# Altium PCB BLDC.PcbDoc
Units mm, origin at the board's own origin, x right, y up, seen from the top; angles counter-clockwise.
Board outline 80 x 80 mm, 2 copper layers (Top Layer, Bottom Layer); 65 components, 38 nets, 162 pads, 103 vias.
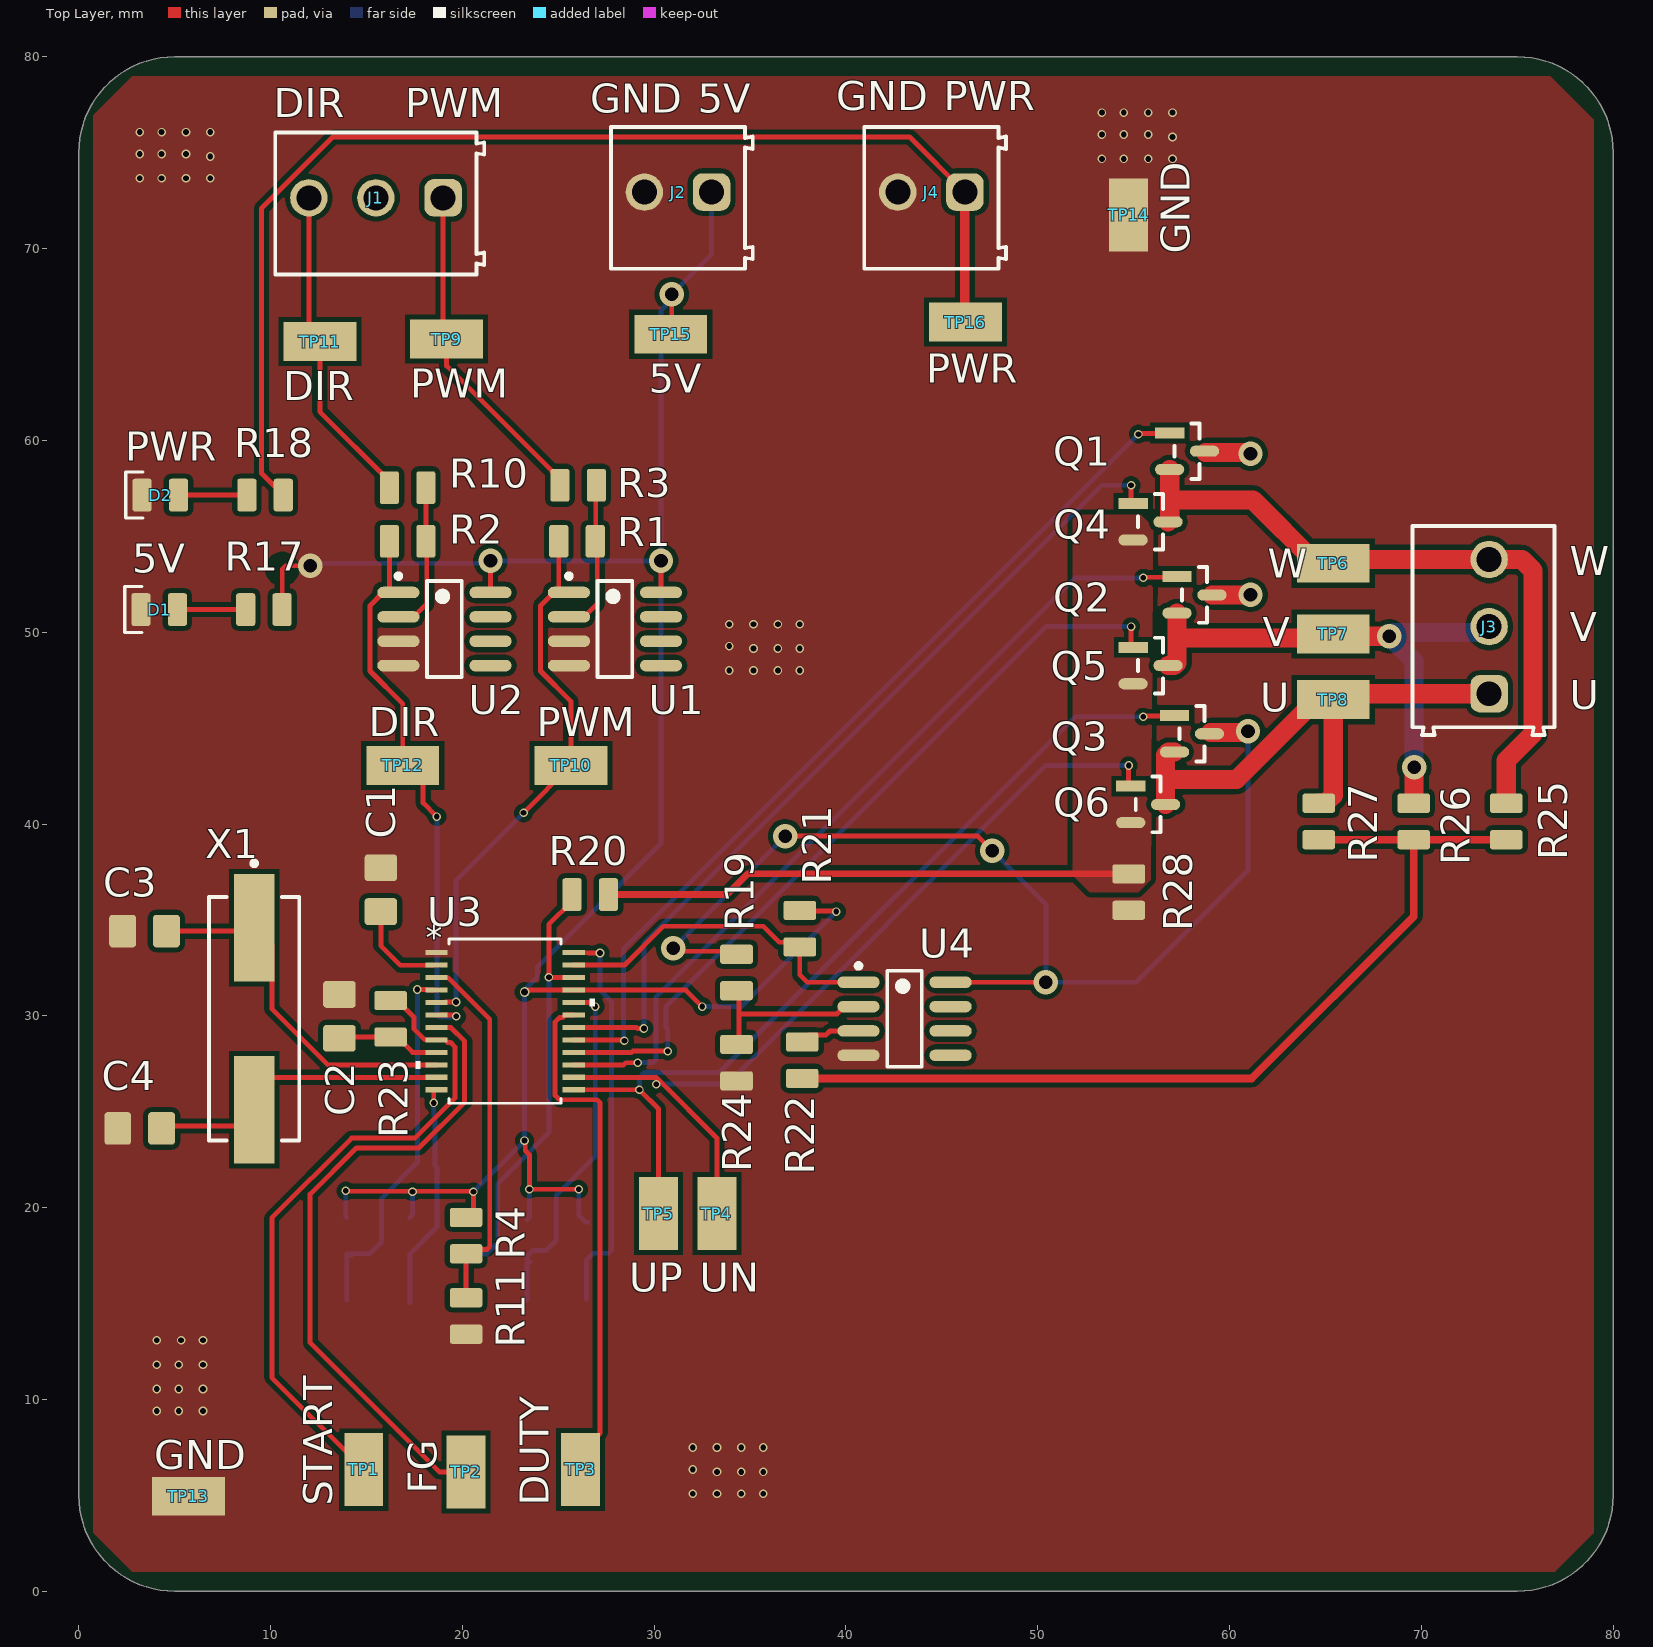
[diagram p0: Top Layer view]
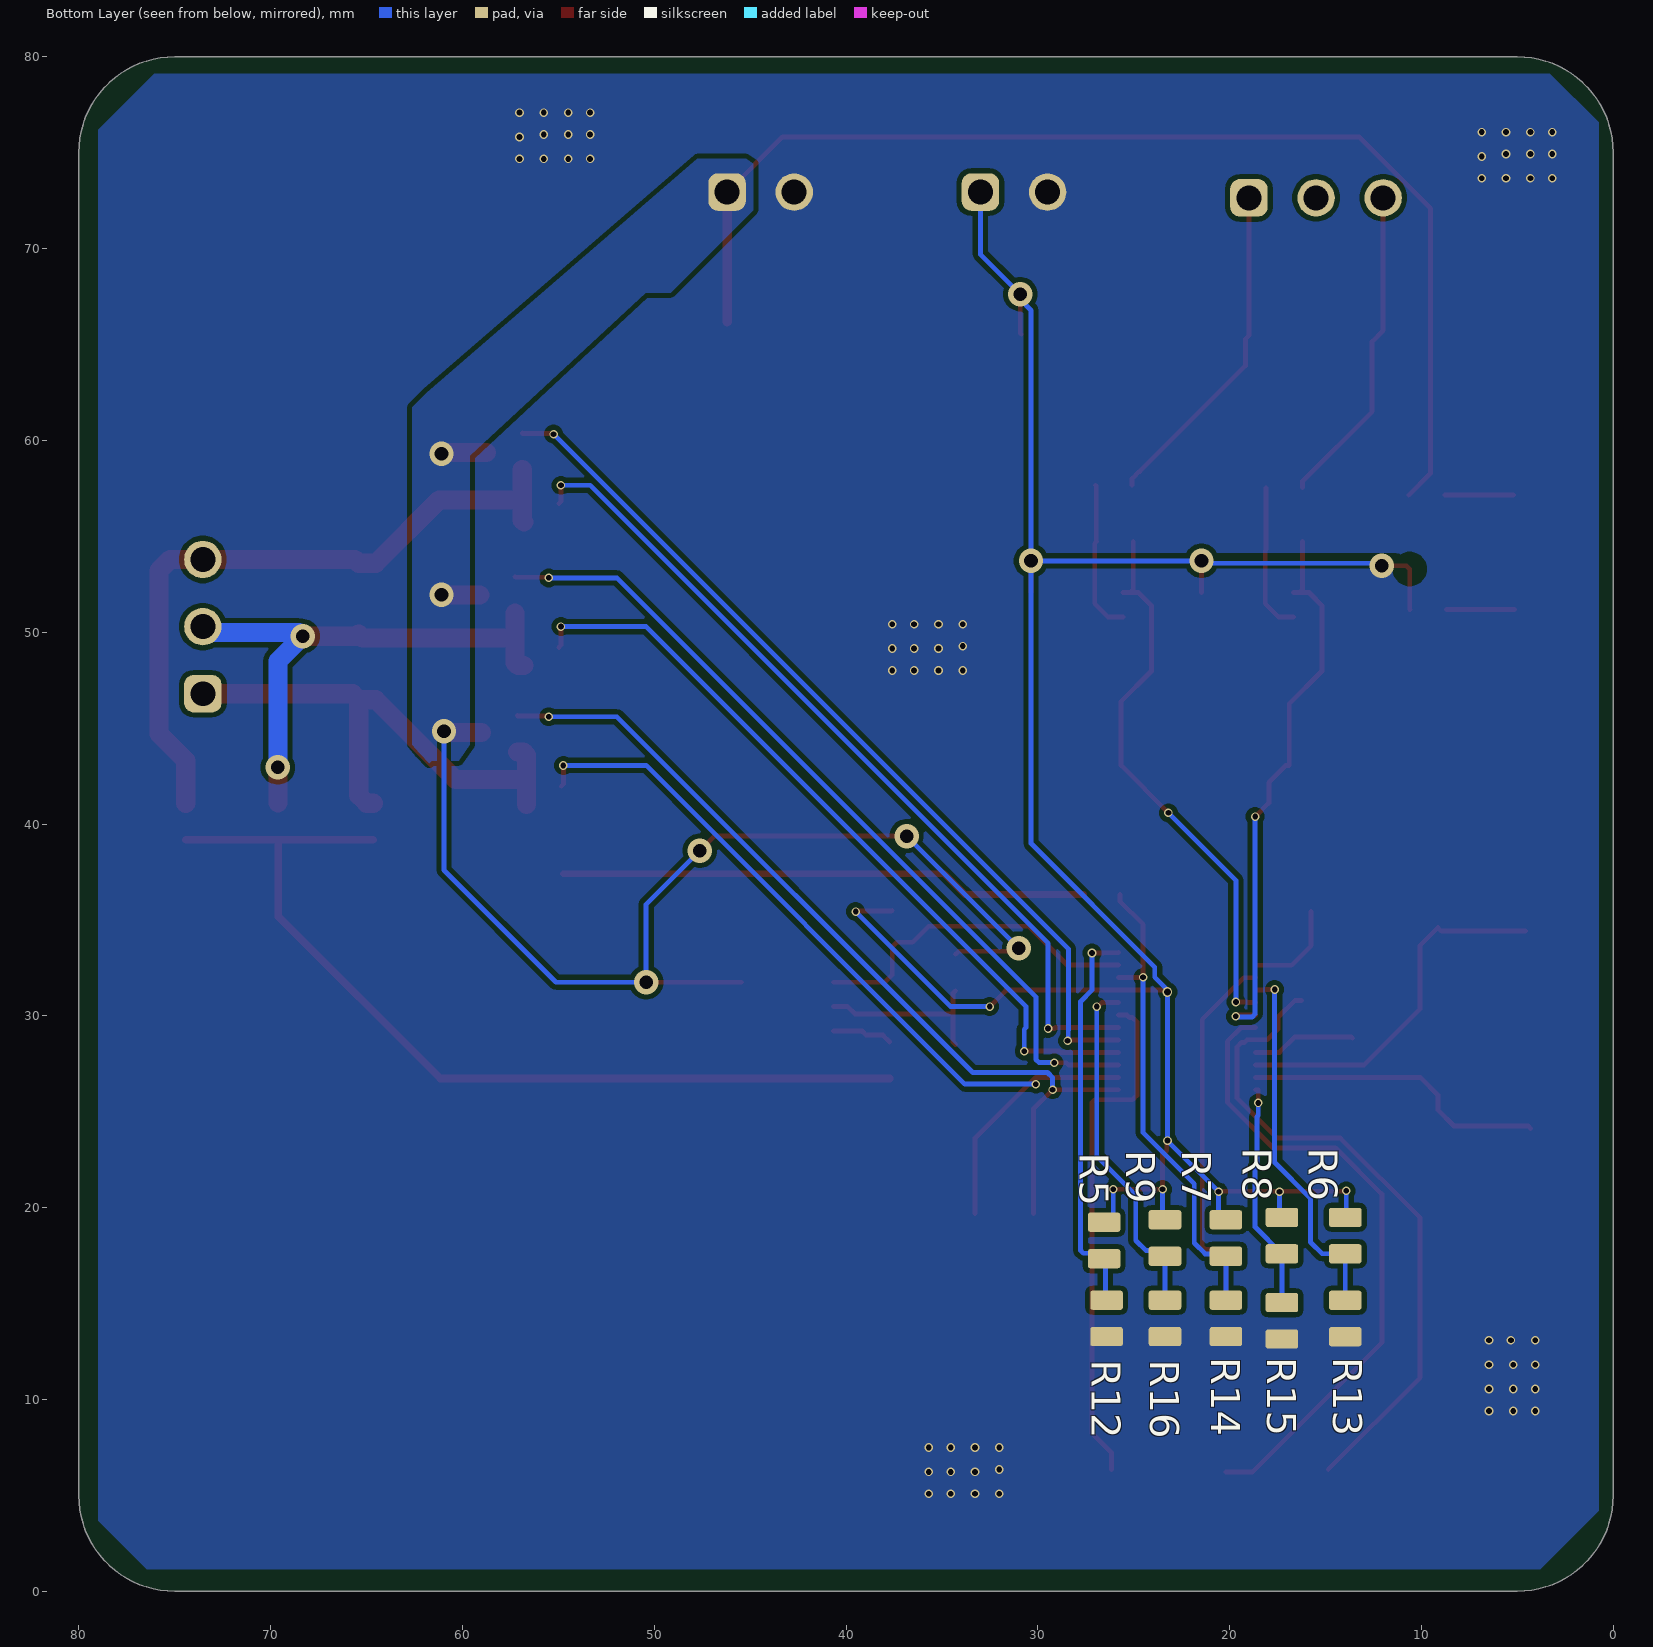
[diagram p1: Bottom Layer view, seen from below]
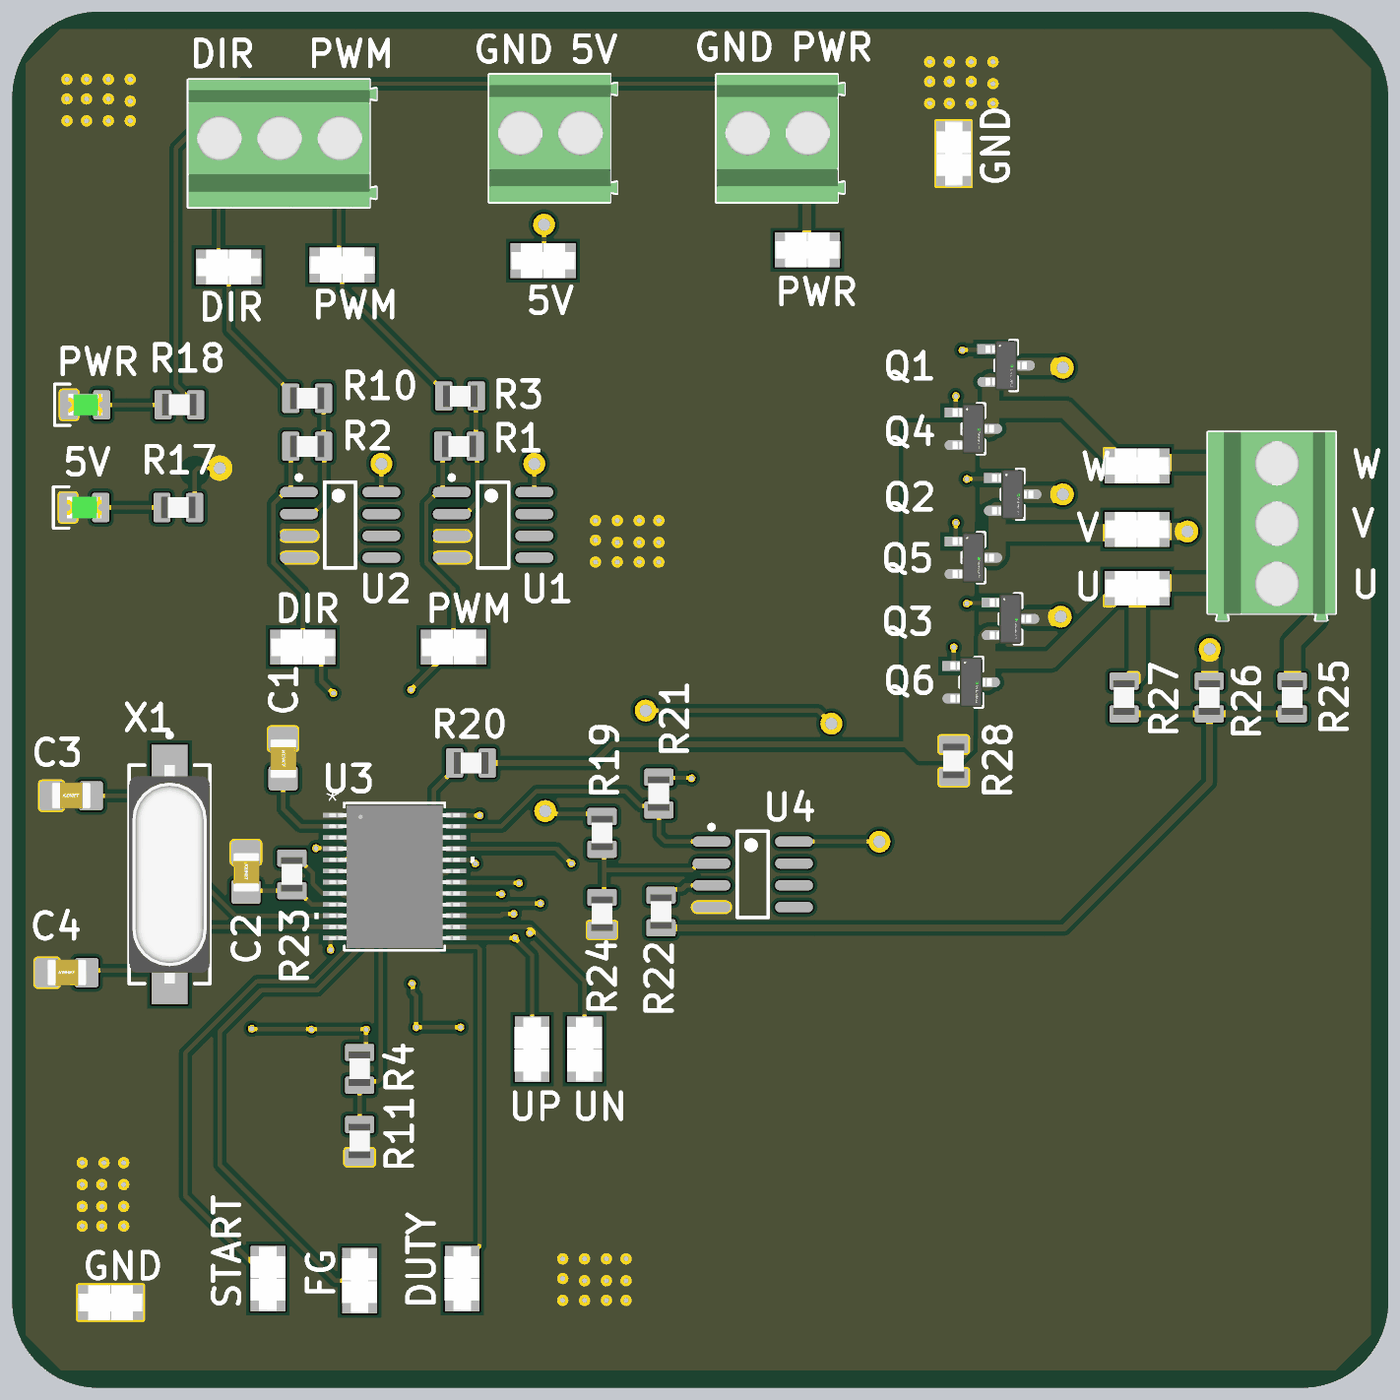
[diagram p2: 3D render of the assembled board from above, using the file's embedded part models]
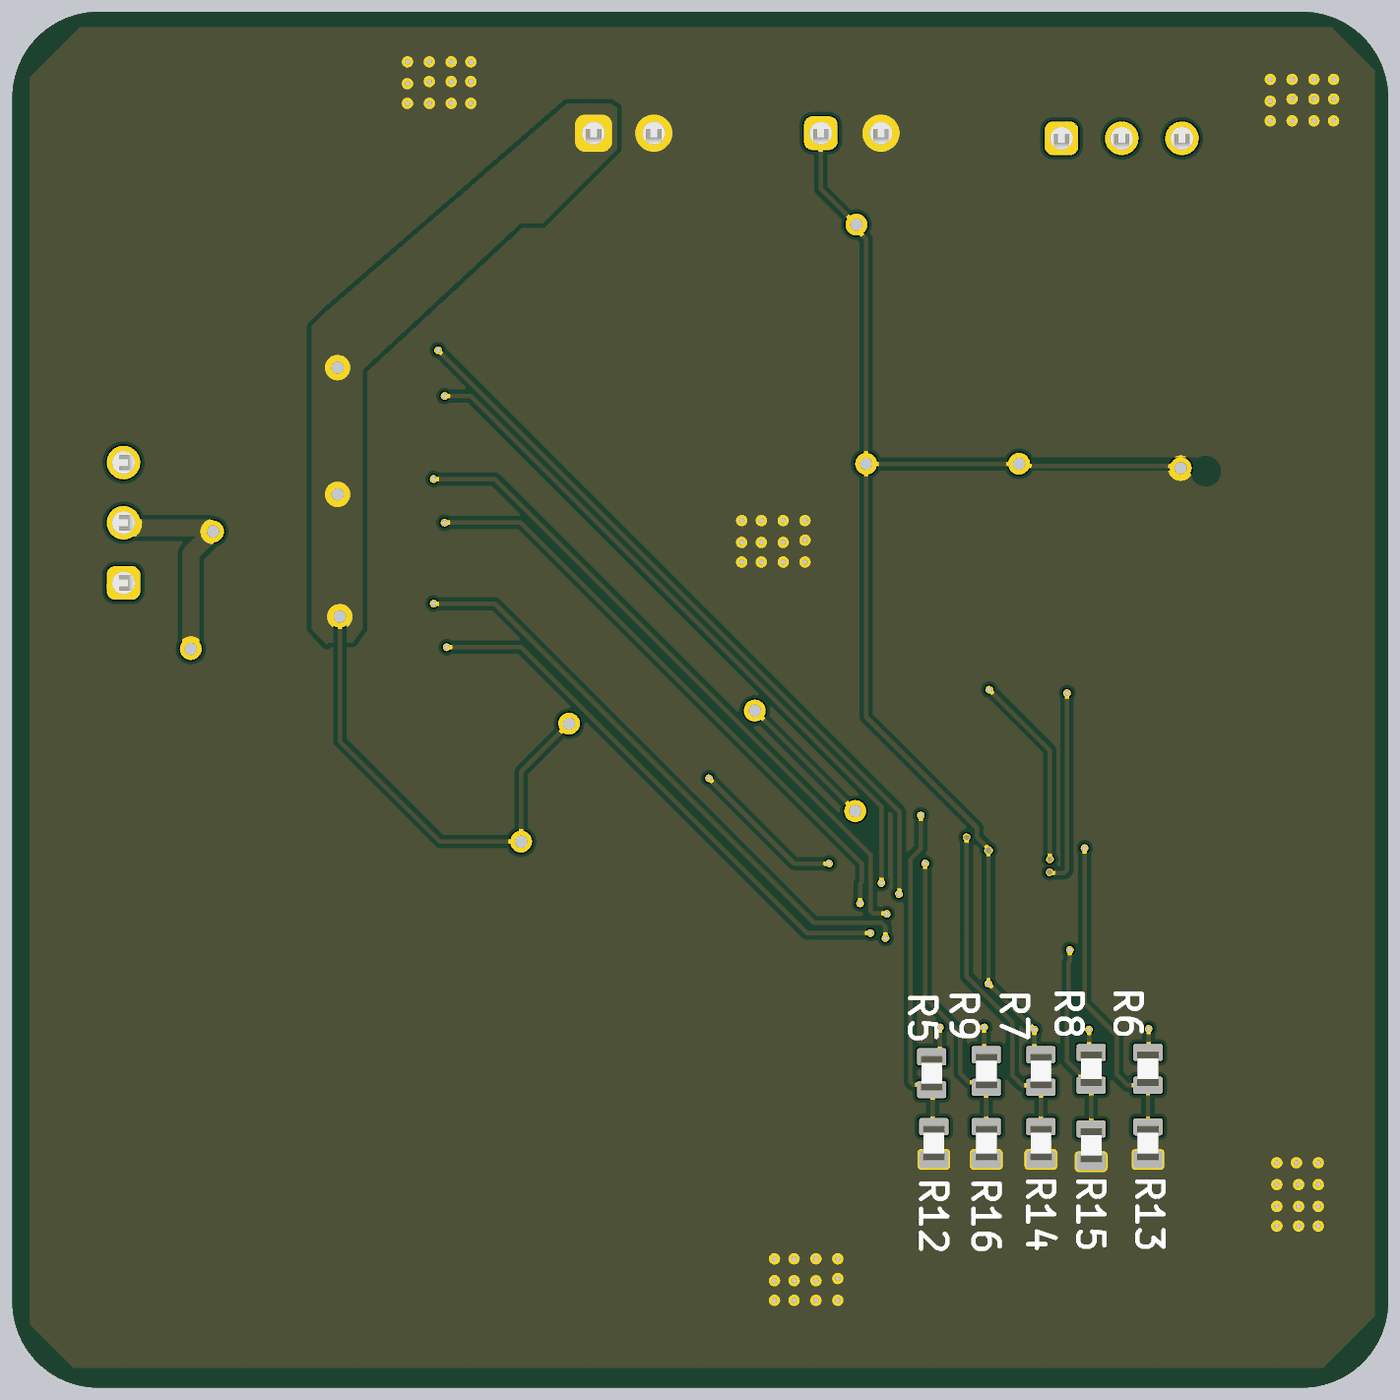
[diagram p3: 3D render of the assembled board from below, using the file's embedded part models]

## Layer stack, top to bottom
Top Solder: solder mask 0.0102, Solder Resist, Dk 3.5
Top Layer: signal copper 0.0356
Dielectric 1: dielectric 0.32, FR-4, Dk 4.8
Bottom Layer: signal copper 0.0356
Bottom Solder: solder mask 0.0102, Solder Resist, Dk 3.5

## Board outline
0,5 0,75 cw(c5,75) 5,80 75,80 cw(c75,75) 80,75 80,5 cw(c75,5) 75,0 5,0 cw(c5,5)

## Design rules (kind name [scope] priority, off if disabled: settings)
Clearance [All] p1: gap=0.254 ignorepadtopadclearanceinfootprint=FALSE except(0: Arc-Hole Track-Hole SMDPad-Hole THPad-Hole Via-Hole Fill-Hole Poly-Hole Region-Hole Text-Hole)
PlaneConnect [All] p1: planeconnectstyle=Direct reliefexpansion=0.508 reliefentries=4 reliefconductorwidth=0.254 reliefairgap=0.254
PolygonConnect [All] p1: connectstyle=Direct reliefconductorwidth=0.254 reliefentries=4 polygonreliefangle="90 Angle" airgapwidth=0.254
RoutingVias [All] p1: holewidth=0.711 width=1.27 viastyle="Through Hole" minholewidth=0.711 minwidth=1.27 maxholewidth=0.711 maxwidth=1.27
SolderMaskExpansion [All] p1: expansion=0.102 istentingtop=FALSE
Width [All] p1: maxlimit=0.254 minlimit=0.254 preferedwidth=0.254
29 further rules are at their usual default settings.

## Components (designator, comment, footprint, x,y, rotation, side; value= is the part's Value field where it differs from the comment)
C1 "0.47u" CAP_0805 15.748,36.576 r270 top
C2 "1u" CAP_0805 13.589,29.972 r270 top
C3 "22p" CAP_0805 3.429,34.417 r0 top
C4 "22p" CAP_0805 3.175,24.13 r0 top
D1 "GREEN" LED_0805_GREEN 4.191,51.181 r0 top
D2 "GREEN" LED_0805_GREEN 4.252,57.15 r0 top
J1 "691214110003" 691214110003 15.494,72.344 r180 top
J2 "691214110002" 691214110002 31.242,72.644 r180 top
J3 "691214110003" 691214110003 73.233,50.292 r90 top
J4 "691214110002" 691214110002 44.45,72.644 r180 top
Q1 "BSS138" FP-318-08-IPC_B 57.785,59.436 r0 top
Q2 "BSS138" FP-318-08-IPC_B 58.166,51.943 r0 top
Q3 "BSS138" FP-318-08-IPC_B 58.039,44.704 r0 top
Q4 "BSS138" FP-318-08-IPC_B 55.88,55.753 r0 top
Q5 "BSS138" FP-318-08-IPC_B 55.88,48.26 r0 top
Q6 "BSS138" FP-318-08-IPC_B 55.753,41.021 r0 top
R1 "200" RES_0805 25.974,54.737 r180 top
R2 "200" RES_0805 17.145,54.737 r180 top
R3 "1k" RES_0805 26.035,57.658 r0 top
R4 "10k_DNP" RES_0805 20.193,18.542 r90 top
R5 "10k_DNP" RES_0805 26.543,18.288 r90 bottom
R6 "10k_DNP" RES_0805 13.97,18.542 r90 bottom
R7 "10k_DNP" RES_0805 20.193,18.415 r90 bottom
R8 "10k_DNP" RES_0805 17.272,18.542 r90 bottom
R9 "10k_DNP" RES_0805 23.368,18.415 r90 bottom
R10 "1k" RES_0805 17.145,57.531 r0 top
R11 "0" RES_0805 20.193,14.351 r90 top
R12 "0_DNP" RES_0805 26.416,14.224 r90 bottom
R13 "0_DNP" RES_0805 13.97,14.219 r90 bottom
R14 "0_DNP" RES_0805 20.193,14.224 r90 bottom
R15 "0_DNP" RES_0805 17.272,14.097 r90 bottom
R16 "0_DNP" RES_0805 23.368,14.224 r90 bottom
R17 "200" RES_0805 9.652,51.181 r0 top
R18 "480" RES_0805 9.713,57.15 r0 top
R19 "100k" RES_0805 34.29,32.258 r90 top
R20 "1" RES_0805 26.67,36.322 r180 top
R21 "10k" RES_0805 37.592,34.544 r90 top
R22 "1k" RES_0805 37.719,27.686 r90 top
R23 "220k" RES_0805 16.256,29.845 r270 top
R24 "100k" RES_0805 34.29,27.559 r90 top
R25 "100k" RES_0805 74.422,40.132 r90 top
R26 "100k" RES_0805 69.596,40.132 r90 top
R27 "100k" RES_0805 64.643,40.132 r90 top
R28 "1" RES_0805 54.737,36.449 r90 top
TP1 "5019" KSTN-5019_V 14.859,6.35 r90 top
TP2 "5019" KSTN-5019_V 20.193,6.223 r90 top
TP3 "5019" KSTN-5019_V 26.162,6.35 r90 top
TP4 "5019" KSTN-5019_V 33.274,19.685 r90 top
TP5 "5019" KSTN-5019_V 30.226,19.685 r90 top
TP6 "5019" KSTN-5019_V 65.405,53.594 r0 top
TP7 "5019" KSTN-5019_V 65.405,49.911 r0 top
TP8 "5019" KSTN-5019_V 65.405,46.482 r0 top
TP9 "5019" KSTN-5019_V 19.177,65.278 r0 top
TP10 "5019" KSTN-5019_V 25.654,43.053 r180 top
TP11 "5019" KSTN-5019_V 12.573,65.151 r180 top
TP12 "5019" KSTN-5019_V 16.891,43.053 r180 top
TP13 "5019" KSTN-5019_V 5.715,4.953 r180 top
TP14 "5019" KSTN-5019_V 54.737,71.755 r270 top
TP15 "5019" KSTN-5019_V 30.861,65.532 r180 top
TP16 "5019" KSTN-5019_V 46.228,66.167 r180 top
U1 "MCP6022-I/SN" SOIC-SN8_N 27.953,50.165 r0 top
U2 "MCP6022-I/SN" SOIC-SN8_N 19.063,50.165 r0 top
U3 "TB6575FNG,C,8,EL" SSOP24-P-300-0p65A_TOS 22.225,29.718 r0 top
U4 "MCP6022-I/SN" SOIC-SN8_N 43.053,29.845 r0 top
X1 "ECS-40-20-5PX-TR" ABRA-ABLS-14.7456MHZ-B2-T_V 9.144,29.845 r270 top

## Footprints (in the part's own frame and the unit in brackets; to place one, negate y for a bottom-side part, rotate by r counter-clockwise, add the part's x,y. Pads: shape width x height; smd on the part's side, far side on the other; paste and mask are expansions set on the pad)
691214110002 [mm] "3.50 mm Horizontal Entry Modular, 2p"
  rrect50% 1.95x1.95 hole 1.3: 1(-1.75,-0.3)
  round 1.95 hole 1.3: 2(1.75,-0.3)
  silkscreen extent -3.9,-3.7 3.5,3.7, body extent -3.95,-3.7 3.5,3.7, height 8.55
691214110003 [mm] "3.50 mm Horizontal Entry Modular, 3p"
  rrect50% 1.95x1.95 hole 1.3: 1(-3.5,-0.3)
  round 1.95 hole 1.3: 2(0,-0.3) 3(3.5,-0.3)
  silkscreen extent -5.65,-3.7 5.25,3.7, body extent -5.7,-3.7 5.25,3.7, height 8.55
ABRA-ABLS-14.7456MHZ-B2-T_V [mm] "SMD, 2-Leads, Body 11.4x4.7mm"
  rect 5.6x2.1 smd: 1(-4.75,0) 2(4.75,0)
  silkscreen extent -8.22,-2.35 6.35,2.35, body extent -6.35,-2.35 6.35,2.35, height 4.16
CAP_0805 [mm]
  rrect25% 1.4x1.7 smd: 1(-1.143,0) 2(1.143,0)
  body extent -1.15,-0.76 1.15,0.79, height 1.01
FP-318-08-IPC_B [mm]
  rect 1.524x0.578 smd paste+0 mask+0: 1(-0.91,0.95)
  rrect100% 1.524x0.578 smd paste+0 mask+0: 2(-0.91,-0.95) 3(0.91,0)
  silkscreen extent -0.65,-1.45 0.65,1.45, body extent -1.92,-1.7 1.92,1.7, height 0.25
KSTN-5019_V [mm] "Test Point, 1-Leads, Body 3.81x2.03mm"
  rect 3.8x2.03 smd: 1(0,0)
  body extent -1.9,-1.01 1.9,1.02, height 2.29
LED_0805_GREEN [mm]
  rrect25% 1x1.7 smd: A(0.95,0) K(-0.95,0)
  silkscreen extent -1.8,-1.2 -0.9,1.2, body extent -1,-0.63 1,0.63, height 1.12
RES_0805 [mm]
  rrect25% 1x1.7 smd: 1(-0.95,0) 2(0.95,0)
  body extent -1,-0.63 1,0.63, height 0.47
SOIC-SN8_N [mm] "SOIC, 8-Leads, Body 4.9x3.9mm, Pitch 1.27mm, IPC Medium Density"
  oval 2.2x0.6 smd: 1(-2.4,1.905) 2(-2.4,0.635) 3(-2.4,-0.635) 4(-2.4,-1.905) 5(2.4,-1.905) 6(2.4,-0.635) 7(2.4,0.635) 8(2.4,1.905)
  silkscreen extent -2.52,-2.5 0.9,2.88, body extent -2,-2.5 2,2.5, height 1.75
SSOP24-P-300-0p65A_TOS [mm]
  rect 1.161x0.271 smd paste+0 mask+0: 1(-3.575,3.575) 2(-3.575,2.925) 3(-3.575,2.275) 4(-3.575,1.625) 5(-3.575,0.975) 6(-3.575,0.325) 7(-3.575,-0.325) 8(-3.575,-0.975) 9(-3.575,-1.625) 10(-3.575,-2.275) 11(-3.575,-2.925) 12(-3.575,-3.575) 13(3.575,-3.575) 14(3.575,-2.925) 15(3.575,-2.275) 16(3.575,-1.625) 17(3.575,-0.975) 18(3.575,-0.325) 19(3.575,0.325) 20(3.575,0.975) 21(3.575,1.625) 22(3.575,2.275) 23(3.575,2.925) 24(3.575,3.575)
  silkscreen extent -4.66,-4.28 4.66,4.28, body extent -3.8,-4.15 3.8,4.15, height 1.6

## Part data
C1 C2 C3 C4: library part CAP_0805, "Capacitor SMD 0805"
D1 D2: library part LED_0805_GREEN, "LED 0805 GREEN SMD"
J1 J3: library part CMP-1502-02466-2, Color="Blue, Green", Current=10A, Max Operating Temperature=105°C, Min Operating Temperature=-40°C, Voltage=300V, Contact Material=Brass, Contact Plating="Brass, Tin", Current Rating=10A, Height=12.2mm, Housing Material=Nylon, Lead Pitch=3.5mm, Length=7.4mm, Mount="Through Hole", NexarPartId=18818289, Number of Contacts=3, Number of Levels=1, Number of Pins=3, Number of Positions Per Level=3, Packaging=Box, Pitch=3.5052mm, Plating="Brass, Steel", REACH SVHC=Unknown, RoHS=Compliant, Stripping Length=-6mm, Termination=Screw, Voltage Rating=300V, Width=10.9mm, Wire Gauge (Max)=24AWG, Wire Gauge (Min)=16AWG, Wire/Cable Gauge=24AWG
J2 J4: library part CMP-1502-02464-2, Color="Blue, Green", Current=10A, Max Operating Temperature=105°C, Min Operating Temperature=-40°C, Voltage=300V, Contact Material=Brass, Contact Plating="Brass, Tin", Current Rating=10A, Height=8.7mm, Housing Material=Nylon, Lead Pitch=3.5mm, Length=7.4mm, Mount="Through Hole", NexarPartId=18818288, Number of Contacts=2, Number of Levels=1, Number of Pins=2, Number of Positions Per Level=2, Number of Rows=1, Packaging=Box, Pitch=3.5052mm, Plating="Brass, Steel", REACH SVHC=Unknown, RoHS=Compliant, Stripping Length=-6mm, Termination=Screw, Voltage Rating=300V, Width=7.9mm, Wire Gauge (Max)=24AWG, Wire Gauge (Min)=16AWG, Wire/Cable Gauge=24AWG
Q1 Q2 Q3 Q4 Q5 Q6: library part CMP-07173-000101-1, "MOSFET N-CH 50V 220MA SOT-23", Case/Package=SOT-23, Continuous Drain Current (ID)=220mA, Drain to Source Breakdown Voltage=50V, Drain to Source Resistance=3.5R, Gate to Source Voltage (Vgs)=20V, Input Capacitance=27pF, Max Operating Temperature=150°C, Max Power Dissipation=360mW, Min Operating Temperature=-55°C, On-State Resistance=6R, Package Quantity=1, Threshold Voltage=1.3V, Contact Plating=Tin, Current Rating=220mA, Drain to Source Voltage (Vdss)=50V, Dual Supply Voltage=50V, Element Configuration=Single, Fall Time=9ns, Height=0.93mm, Lead Free="Lead Free", Length=2.92mm, Mount="Surface Mount", Nominal Vgs=1.3V, Number of Elements=1, Number of Pins=3, Packaging="Tape and Reel", Power Dissipation=360mW, Radiation Hardening=No, Rds On Max=3.5R, REACH SVHC="No SVHC", Rise Time=9ns, Termination=SMD/SMT, Turn-Off Delay Time=20ns, Turn-On Delay Time=2.5ns, Voltage Rating (DC)=50V, Weight=0.03g, Width=1.3mm
R1 R2 R3 R4 R5 R6 R7 R8 R9 R10 R11 R12 R13 R14 R15 R16 R17 R18 R19 R20 R21 R22 R23 R24 R25 R26 R27 R28: library part RES_0805, "Resistor SMD 0805"
TP1 TP2 TP3 TP4 TP5 TP6 TP7 TP8 TP9 TP10 TP11 TP12 TP13 TP14 TP15 TP16: library part CMP-1672-00008-1, "Test Point, 1 Position SMD, RoHS, Tape and Reel", Package Quantity=1000, ComponentLink1Description="Manufacturer URL", ComponentLink1URL=http://www.keyelco.com/, ComponentLink2Description=Datasheet, ComponentLink2URL=http://www.keyelco.com/product-pdf.cfm?p=1357, Contact Plating=Silver, DatasheetVersion=03/2014, Mount="Surface Mount", Mounting Technology="Surface Mount", PackageDescription="1-Pin Surface Mount Device, Body 3.81 x 2.03 mm", PackageReference=5019, Packaging="Tape and Reel", Pins=1, RoHSCompliant=True
U1 U2 U4: library part CMP-0187-00284-3, "None", Case/Package=SOIC, Input Bias Current=150pA, Input Offset Voltage (Vos)=500uV, Max Operating Temperature=85°C, Max Supply Voltage=5.5V, Min Operating Temperature=-40°C, Min Supply Voltage=2.5V, Nominal Supply Current=1mA, Output Current=22mA, Package Quantity=100, Power Supply Rejection Ratio (PSRR)=74dB, Voltage Gain=110dB, Amplifier Type="GENERAL PURPOSE", Bandwidth=10MHz, Common Mode Rejection Ratio=70dB, Gain=110dB, Gain Bandwidth Product=10MHz, Harmonic Distortion=0.00053%, Height=0.049inch, Input Offset Voltage-Max=500uV, Lead Free="Lead Free", Length=0.192inch, Mount="Surface Mount", Number of Amplifiers=2, Number of Channels=2, Number of Circuits=2, Number of Elements=2, Number of Pins=8, Packaging=Rail/Tube, Radiation Hardening=No, REACH SVHC="No SVHC", RoHS Compliant=Yes, Slew Rate=7V/µs, Supply Current=1mA, Technology=CMOS, Unity Gain Bandwidth Product=10MHz, Width=0.154inch
U3: "No Description Available", Mfr_Name="Toshiba Electronic Devices & Storage Corp.", RefDes=RefDes, Type=Type
X1: library part CMP-2000-05726-1, "Low Profile Crystal, 8.0 MHz, +/- 30 ppm, -20 to 70 degC, 2-Pin SMD, RoHS, Tape and Reel", Case Height=4.2mm, Case Length=11.4mm, Case Width=4.7mm, Frequency=8MHz, Frequency Stability=50PPM, Load Capacitance=18pF, Manufacturer=ABRACON, Operating Temperature Range=-20Cto+70C, Package / Case=HC-49/US, Package Description="2-Pin Surface Mount Device, Body 11.4 x 4.7 mm", Package Reference=ABLS-14.7456MHZ-B2-T, Tolerance=30PPM, Brand=ABRACON, Datasheet URL=http://www.abracon.com/Resonators/abls.pdf, Datasheet Version=04/2011, Dimensions=4.7mmWx11.4mmLx4.2mmH, ESR=80Ohms, Factory Pack Quantity=1000, Manufacturer URL=http://www.abracon.com/, Mounting Style=SMD/SMT, Mounting Technology=SurfaceMount, Package URL=http://www.abracon.com/Support/PackageDrawing/Resonators/ABLS-2D.pdf, Packaging=Reel, Product Category=Crystals, RoHS=Details, Series=ABLS, Termination Style=SMD/SMT, Type=LowProfileMicroprocessorCrystal

## Via types
v1: diameter 0.45, hole 0.3, Top Layer to Bottom Layer, 89 vias
v2: diameter 1.27, hole 0.711, Top Layer to Bottom Layer, 13 vias
v3: diameter 0.5, hole 0.35, Top Layer to Bottom Layer, 1 vias

## Nets (pads, with @x,y where several pads share a name; then routed paths per layer and width w, separated by ;. In a path a pad name is that pad's centre, name@x,y a point inside that pad or via, vN(x,y) a via of type N, cw(c..) or ccw(c..) an arc to the next point about the centre after c; other vN are vias at no path point)
+5V: J2.1 R4.2 R5.2 R6.2 R7.2 R8.2 R9.2 R17.2 R21.2 TP15.1 U1.8 U2.8 U3.21 | length 126.9
  Top Layer w0.254: R17.2 10.606,51.185 10.606,53.289 10.783,53.467 v2(12.065,53.467) ; v1(13.922,20.876) 13.946,20.852 20.55,20.852 v1(20.574,20.828) 20.574,19.738 20.328,19.492 R4.2 ; U2.8 v2(21.463,53.721) ; v1(23.241,23.495) 23.279,23.457 23.279,22.978 23.495,22.762 v1(23.495,20.955) v1(26.064,20.955) ; v3(23.241,31.242) 23.308,31.242 23.409,31.343 U3.21 31.649,31.343 v1(32.512,30.48) ; U1.8 v2(30.353,53.721) ; TP15.1 30.918,65.589 v2(30.918,67.626) ; R21.2 37.623,35.464 39.466,35.464 v1(39.497,35.433)
  Bottom Layer w0.254: v2(12.065,53.467) 12.192,53.594 21.336,53.594 v2(21.463,53.721) v2(30.353,53.721) ; v1(13.922,20.876) 13.922,19.54 R6.2 ; R8.2 17.399,19.619 v1(17.399,20.828) ; R7.2 20.328,19.365 20.574,19.611 v1(20.574,20.828) v1(23.241,23.495) v3(23.241,31.242) 23.241,31.351 23.905,32.015 23.905,32.541 30.353,38.989 v2(30.353,53.721) ; R9.2 23.495,19.492 v1(23.495,20.955) ; v1(26.064,20.955) 26.064,19.611 26.437,19.238 R5.2 ; v1(32.512,30.48) 34.544,30.48 v1(39.497,35.433) ; J2.1 32.992,69.7 v2(30.918,67.626) 30.918,67.351 30.353,66.786 v2(30.353,53.721)
DIR_IN: J1.3 R10.1 TP11.1 | length 16.9
  Top Layer w0.254: J1.3 11.994,65.73 TP11.1 12.573,61.503 16.195,57.881 R10.1
DIR_OUT: R2.2 TP12.1 U2.1 U3.6 | length 29.5
  Top Layer w0.254: R2.2 16.195,52.23 U2.1@16.355,52.07 ; U2.1 U2.1@16.355,52.07 ; U3.6 18.658,30.035 19.569,30.035 19.632,29.972 v1(19.685,29.972) ; v1(18.669,40.386) 17.951,41.104 17.951,42.165 17.063,43.053 TP12.1 16.891,46.269 15.182,47.978 15.182,51.389 15.863,52.07 U2.1@16.355,52.07
  Bottom Layer w0.254: v1(18.669,40.386) 18.669,30.099 18.834,29.934 19.647,29.934 v1(19.685,29.972)
DUTY: TP3.1 U3.19 | length 27
  Top Layer w0.254: U3.19 25.355,30.043 25.221,29.909 25.198,29.909 25.062,29.909 24.838,29.686 24.838,25.85 25.062,25.627 27.029,25.627 27.178,25.478 27.178,8.251 26.162,7.235 TP3.1
FG_OUT: TP2.1 U3.7 | length 33.6
  Top Layer w0.254: U3.7 18.658,29.385 19.406,29.385 20.12,28.671 20.12,25.497 17.736,23.114 14.478,23.114 12.065,20.701 12.065,12.954 18.796,6.223 TP2.1
FMAX: R6.1 R13.2 U3.4 | length 19.6
  Top Layer w0.254: v1(17.653,31.369) 18.179,31.369 18.205,31.343 U3.4
  Bottom Layer w0.254: R13.2 13.97,17.526 R6.1@14.218,17.526 ; R6.1 15.179,17.592 15.793,18.206 15.793,20.492 17.653,22.352 v1(17.653,31.369)
FST: R5.1 R12.2 U3.24 | length 20.7
  Top Layer w0.254: U3.24 25.808,33.285 26.561,33.285 26.572,33.274 v1(27.178,33.274)
  Bottom Layer w0.254: R12.2@26.479,15.238 26.479,17.275 26.828,17.623 27.625,17.623 27.774,17.772 27.774,30.741 27.178,31.337 v1(27.178,33.274)
GND: C1.1 C2.1 C3.1 C4.1 D1.K D2.K J2.2 J4.2 R11.1 R12.1 R13.1 R14.1 R15.1 R16.1 R24.1 R28.1 TP13.1 TP14.1 U1.3 U1.4 U2.3 U2.4 U3.1 U4.4
  other v1: 32.004,5.08 33.274,5.08 34.544,5.08 35.687,5.08 33.274,6.223 34.544,6.223 35.687,6.223 32.004,6.35 32.004,7.493 33.274,7.493 34.544,7.493 35.687,7.493 4.064,9.398 5.207,9.398 6.477,9.398 4.064,10.541 5.207,10.541 6.477,10.541 4.064,11.811 5.207,11.811 6.477,11.811 4.064,13.081 5.334,13.081 6.477,13.081 33.909,48.006 35.179,48.006 36.449,48.006 37.592,48.006 35.179,49.149 36.449,49.149 37.592,49.149 33.909,49.276 33.909,50.419 35.179,50.419 36.449,50.419 37.592,50.419 3.175,73.66 4.318,73.66 5.588,73.66 6.858,73.66 53.34,74.676 54.483,74.676 55.753,74.676 57.023,74.676 6.858,74.803 3.175,74.93 4.318,74.93 5.588,74.93 57.023,75.819 53.34,75.946 54.483,75.946 55.753,75.946 3.175,76.073 4.318,76.073 5.588,76.073 6.858,76.073 53.34,77.089 54.483,77.089 55.753,77.089 57.023,77.089
IP: C2.2 R23.2 U3.9 | length 5.4
  Top Layer w0.254: C2.2 13.655,28.895 R23.2 16.606,28.895 17.408,28.093 U3.9
LA: R8.1 R15.2 U3.12 | length 11.9
  Top Layer w0.254: v1(18.506,25.459) 18.506,26.135 18.514,26.143 U3.12
  Bottom Layer w0.254: R15.2 R8.1 18.669,18.989 18.669,22.116 18.582,22.203 18.582,24.726 18.506,24.802 v1(18.506,25.459)
MOT_OUT: Q4.2 Q5.2 Q6.2 R20.1 R28.2 | length 27.6
  Top Layer w0.35: R20.1 33.797,36.322 34.874,37.399 R28.2
MOTOR_U: J3.1 Q3.2 Q6.3 R27.2 TP8.1 | length 27.8
  Top Layer w1: Q6.3 56.663,42.313 ; Q3.2 56.813,43.754 56.663,43.604 56.663,42.313 ; R27.2 64.993,41.082 65.405,41.494 TP8.1 ; J3.1 65.715,46.792 TP8.1 ; 56.663,42.313 60.351,42.313 64.52,46.482 TP8.1
MOTOR_V: J3.2 Q2.2 Q5.3 R26.2 TP7.1 | length 29
  Top Layer w0.254: R26.2 R26.2@69.619,41.105
  Top Layer w1: Q5.3 57.106,48.26 57.256,48.41 57.256,49.701 ; Q2.2 57.256,49.701 ; v2(68.326,49.784) 65.532,49.784 TP7.1 65.195,49.701 57.256,49.701 ; R26.2@69.619,41.105 v2(69.619,42.95)
  Bottom Layer w1: v2(69.619,42.95) 69.619,48.491 v2(68.326,49.784) 68.52,49.978 73.219,49.978 J3.2
MOTOR_W: J3.3 Q1.2 Q4.3 R25.2 TP6.1 | length 36.1
  Top Layer w1: Q4.3 56.875,55.838 56.875,56.896 ; Q1.2 56.875,56.896 ; R25.2 74.422,43.307 75.819,44.704 75.819,53.213 75.24,53.792 J3.3 65.603,53.792 TP6.1 64.52,53.594 61.218,56.896 56.875,56.896
NetC3_2: C3.2 U3.10 X1.1 | length 19.1
  Top Layer w0.254: C3.2 8.966,34.417 X1.1 10.067,33.672 10.067,30.365 12.989,27.443 U3.10
NetC4_2: C4.2 U3.11 X1.2 | length 15.9
  Top Layer w0.254: C4.2 4.442,24.254 8.303,24.254 X1.2 9.144,25.87 10.067,26.793 U3.11
NetD1_A: D1.A R17.1 | length 3.6
  Top Layer w0.254: D1.A R17.1
NetD2_A: D2.A R18.1 | length 3.6
  Top Layer w0.254: D2.A R18.1
NetR1_1: R1.1 R3.2 U1.2 | length 8
  Top Layer w0.254: U1.2 26.353,50.8 27.034,51.481 27.034,54.627 R1.1 26.955,54.768 26.955,57.627 R3.2
NetR2_1: R2.1 R10.2 U2.2 | length 7.8
  Top Layer w0.254: U2.2 17.463,50.8 18.144,51.481 18.144,54.273 18.095,54.322 R2.1 R10.2
NetR19_1: R19.1 R24.2 U4.2 | length 9.3
  Top Layer w0.254: R24.2 34.417,28.636 34.417,30.099 ; R19.1 34.417,31.181 34.417,30.099 ; U4.2 39.912,30.48 39.531,30.099 34.417,30.099
NetR22_2: R22.2 U4.3 | length 3.2
  Top Layer w0.254: R22.2 38.075,28.992 38.95,28.992 39.168,29.21 U4.3
OC: R7.1 R14.2 R20.2 U3.22 | length 25.5
  Top Layer w0.254: R20.2 25.72,35.972 24.511,34.763 v1(24.511,32.004) 25.117,32.004 25.12,32.001 25.792,32.001 U3.22
  Bottom Layer w0.254: R14.2 20.193,17.092 20.273,17.172 20.347,17.172 20.199,17.321 R7.1 20.314,17.586 21.275,17.586 21.844,18.155 21.844,21.241 24.511,23.908 v1(24.511,32.004)
OS: R4.1 R11.2 U3.3 | length 19.2
  Top Layer w0.254: U3.3 18.658,31.985 19.263,31.985 21.424,29.824 21.424,17.966 21.275,17.817 20.418,17.817 R4.1 R11.2
OUT_UN: Q6.1 TP4.1 U3.14 | length 45.6
  Top Layer w0.254: U3.14 30.103,26.793 30.281,26.615 ; v1(30.103,26.437) 30.281,26.615 ; TP4.1 33.274,23.622 30.281,26.615 ; v1(54.737,43.053) 54.737,42.077 Q6.1
  Bottom Layer w0.254: v1(30.103,26.437) 33.803,26.437 50.419,43.053 v1(54.737,43.053)
OUT_UP: Q3.1 TP5.1 U3.13 | length 46.7
  Top Layer w0.254: U3.13 v1(29.229,26.143) 30.226,25.146 TP5.1 ; v1(55.499,45.593) 55.53,45.624 57.098,45.624 Q3.1
  Bottom Layer w0.254: v1(29.229,26.143) 29.229,26.776 29.495,27.043 33.393,27.043 51.943,45.593 v1(55.499,45.593)
OUT_VN: Q5.1 U3.16 | length 40.9
  Top Layer w0.254: U3.16 28.832,28.093 28.895,28.157 v1(30.705,28.157) ; v1(54.864,50.292) 54.864,49.316 Q5.1
  Bottom Layer w0.254: v1(30.705,28.157) 30.705,29.296 30.607,29.394 30.607,30.48 50.419,50.292 v1(54.864,50.292)
OUT_VP: Q2.1 U3.15 | length 43.9
  Top Layer w0.254: U3.15 28.413,27.443 28.521,27.551 v1(29.146,27.551) ; v1(55.499,52.832) 55.53,52.863 57.225,52.863 Q2.1
  Bottom Layer w0.254: v1(29.146,27.551) 29.171,27.575 29.95,27.575 30.099,27.724 30.099,30.988 51.943,52.832 v1(55.499,52.832)
OUT_WN: Q4.1 U3.18 | length 44.4
  Top Layer w0.254: U3.18 29.069,29.393 29.12,29.342 29.459,29.342 v1(29.464,29.337) ; v1(54.864,57.658) 54.864,56.809 Q4.1
  Bottom Layer w0.254: v1(29.464,29.337) 29.464,33.782 53.34,57.658 v1(54.864,57.658)
OUT_WP: Q1.1 U3.17 | length 47.1
  Top Layer w0.254: U3.17 25.808,28.735 28.415,28.735 v1(28.448,28.702) ; v1(55.245,60.325) 55.276,60.356 56.844,60.356 Q1.1
  Bottom Layer w0.254: v1(28.448,28.702) 28.41,28.74 28.41,29.242 28.408,29.245 28.408,33.488 v1(55.245,60.325)
POS_IN: R22.1 R25.1 R26.1 R27.1 | length 49.2
  Top Layer w0.4: R22.1 61.153,26.736 69.596,35.179 R26.1 ; R27.1 69.246,39.182 R26.1 ; R25.1 R26.1
POS_OUT: R21.1 U3.23 U4.1 | length 17.8
  Top Layer w0.254: U3.23 28.452,32.643 30.48,34.671 35.687,34.671 36.524,33.834 37.352,33.834 R21.1 37.592,32.131 37.973,31.75 U4.1
PWM_IN: J1.1 R3.1 TP9.1 | length 17.5
  Top Layer w0.254: J1.1 18.994,65.461 TP9.1 19.177,63.882 24.678,58.381 24.712,58.381 25.085,58.008 R3.1
PWM_OUT: R1.2 TP10.1 U1.1 U3.5 | length 29.3
  Top Layer w0.254: U3.5 19.095,30.693 19.122,30.72 v1(19.671,30.72) ; v1(23.192,40.58) 23.192,40.591 TP10.1 25.654,46.396 24.072,47.978 24.072,51.389 24.753,52.07 U1.1@25.184,52.07 ; R1.2 25.024,52.23 U1.1@25.184,52.07 ; U1.1 U1.1@25.184,52.07
  Bottom Layer w0.254: v1(19.671,30.72) 19.671,37.059 v1(23.192,40.58)
SC: C1.2 U3.2 | length 5.1
  Top Layer w0.254: C1.2 15.748,33.655 16.764,32.639 18.646,32.639 U3.2
SEL_LAP: R9.1 R16.2 U3.20 | length 18.6
  Top Layer w0.254: U3.20 26.245,30.693 26.254,30.685 26.666,30.685 26.871,30.48 v1(26.924,30.48)
  Bottom Layer w0.254: R16.2 23.368,17.092 23.448,17.172 23.522,17.172 23.374,17.321 23.368,17.424 R9.1 23.671,17.768 24.372,17.768 24.892,18.288 24.892,20.64 26.924,22.672 v1(26.924,30.48)
START: R23.1 TP1.1 U3.8 | length 34.6
  Top Layer w0.254: TP1.1 10.07,11.139 10.07,19.468 14.224,23.622 17.526,23.622 19.612,25.708 19.612,28.386 19.388,28.609 19.252,28.609 19.229,28.609 19.087,28.751 18.037,28.751 17.487,29.301 17.487,29.914 16.606,30.795 R23.1
Vbatt: J4.1 Q1.3 Q2.3 Q3.3 R18.2 R19.2 TP16.1 U4.8 | length 124.1
  Top Layer w0.254: R18.2 9.525,58.288 9.525,72.093 13.251,75.819 43.325,75.819 J4.1 ; v2(30.988,33.528) 31.148,33.368 34.13,33.368 R19.2 ; v2(36.83,39.37) 46.863,39.37 v2(47.625,38.608) ; U4.8 v2(50.419,31.75) ; TP16.1@46.2,66.195 TP16.1 ; Q1.3 Q1.3@58.757,59.374 ; Q3.3 Q3.3@59.011,44.766 ; v2@60.895,44.766 v2(60.96,44.831) ; v2@61.022,59.374 v2(61.087,59.309)
  Top Layer w0.5: TP16.1@46.2,66.195 J4.1
  Top Layer w1: Q1.3@58.757,59.374 v2@61.022,59.374 ; Q3.3@59.011,44.766 v2@60.895,44.766 ; Q2.3 v2(61.087,51.943)
  Bottom Layer w0.254: v2(30.988,33.528) v2(36.83,39.37) ; v2(47.625,38.608) 50.419,35.814 v2(50.419,31.75) 55.118,31.75 60.96,37.592 v2(60.96,44.831)
pads on no net: J1.2 U1.5 U1.6 U1.7 U2.5 U2.6 U2.7 U4.5 U4.6 U4.7

## Polygon pours and split planes (outlines as drawn)
GND on Top Layer "NONET_L01_P-001" (solid, pour order 6): 2.794,78.994 0.762,76.962 0.762,3.048 2.794,1.016 76.962,1.016 78.994,3.048 78.994,76.708 76.708,78.994
MOT_OUT on Top Layer "NONET_L01_P-001" (solid, pour order 0): 52.705,36.449 51.816,37.338 51.816,55.88 52.07,56.134 55.372,56.134 56.007,55.499 55.879,37.083 55.245,36.449
GND on Bottom Layer "NONET_L01_P-001" (solid, pour order 3): 3.302,79.121 0.762,76.581 0.762,4.191 3.81,1.143 76.454,1.143 78.613,3.302 78.994,3.683 78.994,76.2 76.073,79.121
Vbatt on Bottom Layer "NONET_L01_P-001" (solid, pour order 2): 47.752,74.676 45.339,74.676 45.212,74.676 44.831,74.422 44.831,72.009 49.149,67.691 50.453,67.691 59.614,59.193 59.614,44.134 60.198,43.307 61.595,43.307 61.722,43.18 62.23,43.688 62.611,44.134 62.611,61.722 61.849,62.484

## Silkscreen, mask and mechanical layers (free items; w line width, h text height)
Top Overlay:
  text "GND" at 39.497,77.216 h1.52
  text "PWR" at 45.085,77.216 h1.52
  text "GND" at 26.67,77.089 h1.52
  text "5V" at 32.258,77.089 h1.52
  text "DIR" at 10.16,76.835 h1.52
  text "PWM" at 17.018,76.835 h1.52
  text "GND" at 57.912,69.723 h1.52 r90
  text "PWR" at 44.196,62.992 h1.52
  text "5V" at 29.718,62.484 h1.52
  text "PWM" at 17.272,62.23 h1.52
  text "DIR" at 10.668,62.103 h1.52
  text "PWR" at 2.413,58.928 h1.52
  text "5V" at 2.794,53.086 h1.52
  text "W" at 77.724,52.959 h1.52
  text "W" at 61.976,52.832 h1.52
  text "V" at 77.724,49.53 h1.52
  text "V" at 61.722,49.276 h1.52
  text "U" at 77.724,45.974 h1.52
  text "U" at 61.595,45.847 h1.52
  text "DIR" at 15.113,44.577 h1.52
  text "PWM" at 23.876,44.577 h1.52
  text "UP" at 28.702,15.621 h1.52
  text "UN" at 32.385,15.621 h1.52
  text "GND" at 3.937,6.35 h1.52
  text "FG" at 18.669,5.08 h1.52 r90
  text "START" at 13.208,4.445 h1.52 r90
  text "DUTY" at 24.511,4.445 h1.52 r90
Mechanical 13:
  the board outline again, w0.254

## Text inside footprints (layer, text, board x,y; h text height)
D1: Mechanical 13 "+" at 5.958,52.181 h1
D2: Mechanical 13 "+" at 6.019,58.15 h1
U3: Mechanical 13 "*" at 19.489,32.522 h1.27; Top Overlay "*" at 18.079,33.437 h1.27